# Altium PCB FEM.PcbDoc (part 1 of 2)
Units mil, origin at the board's own origin, x right, y up, seen from the top; angles counter-clockwise.
Board outline 1528 x 1869 mil, 4 copper layers (Top Layer, Internal Plane 1, Signal Layer 1, Bottom Layer), stack 60.752 mil thick; 238 components, 134 nets, 657 pads, 326 vias.
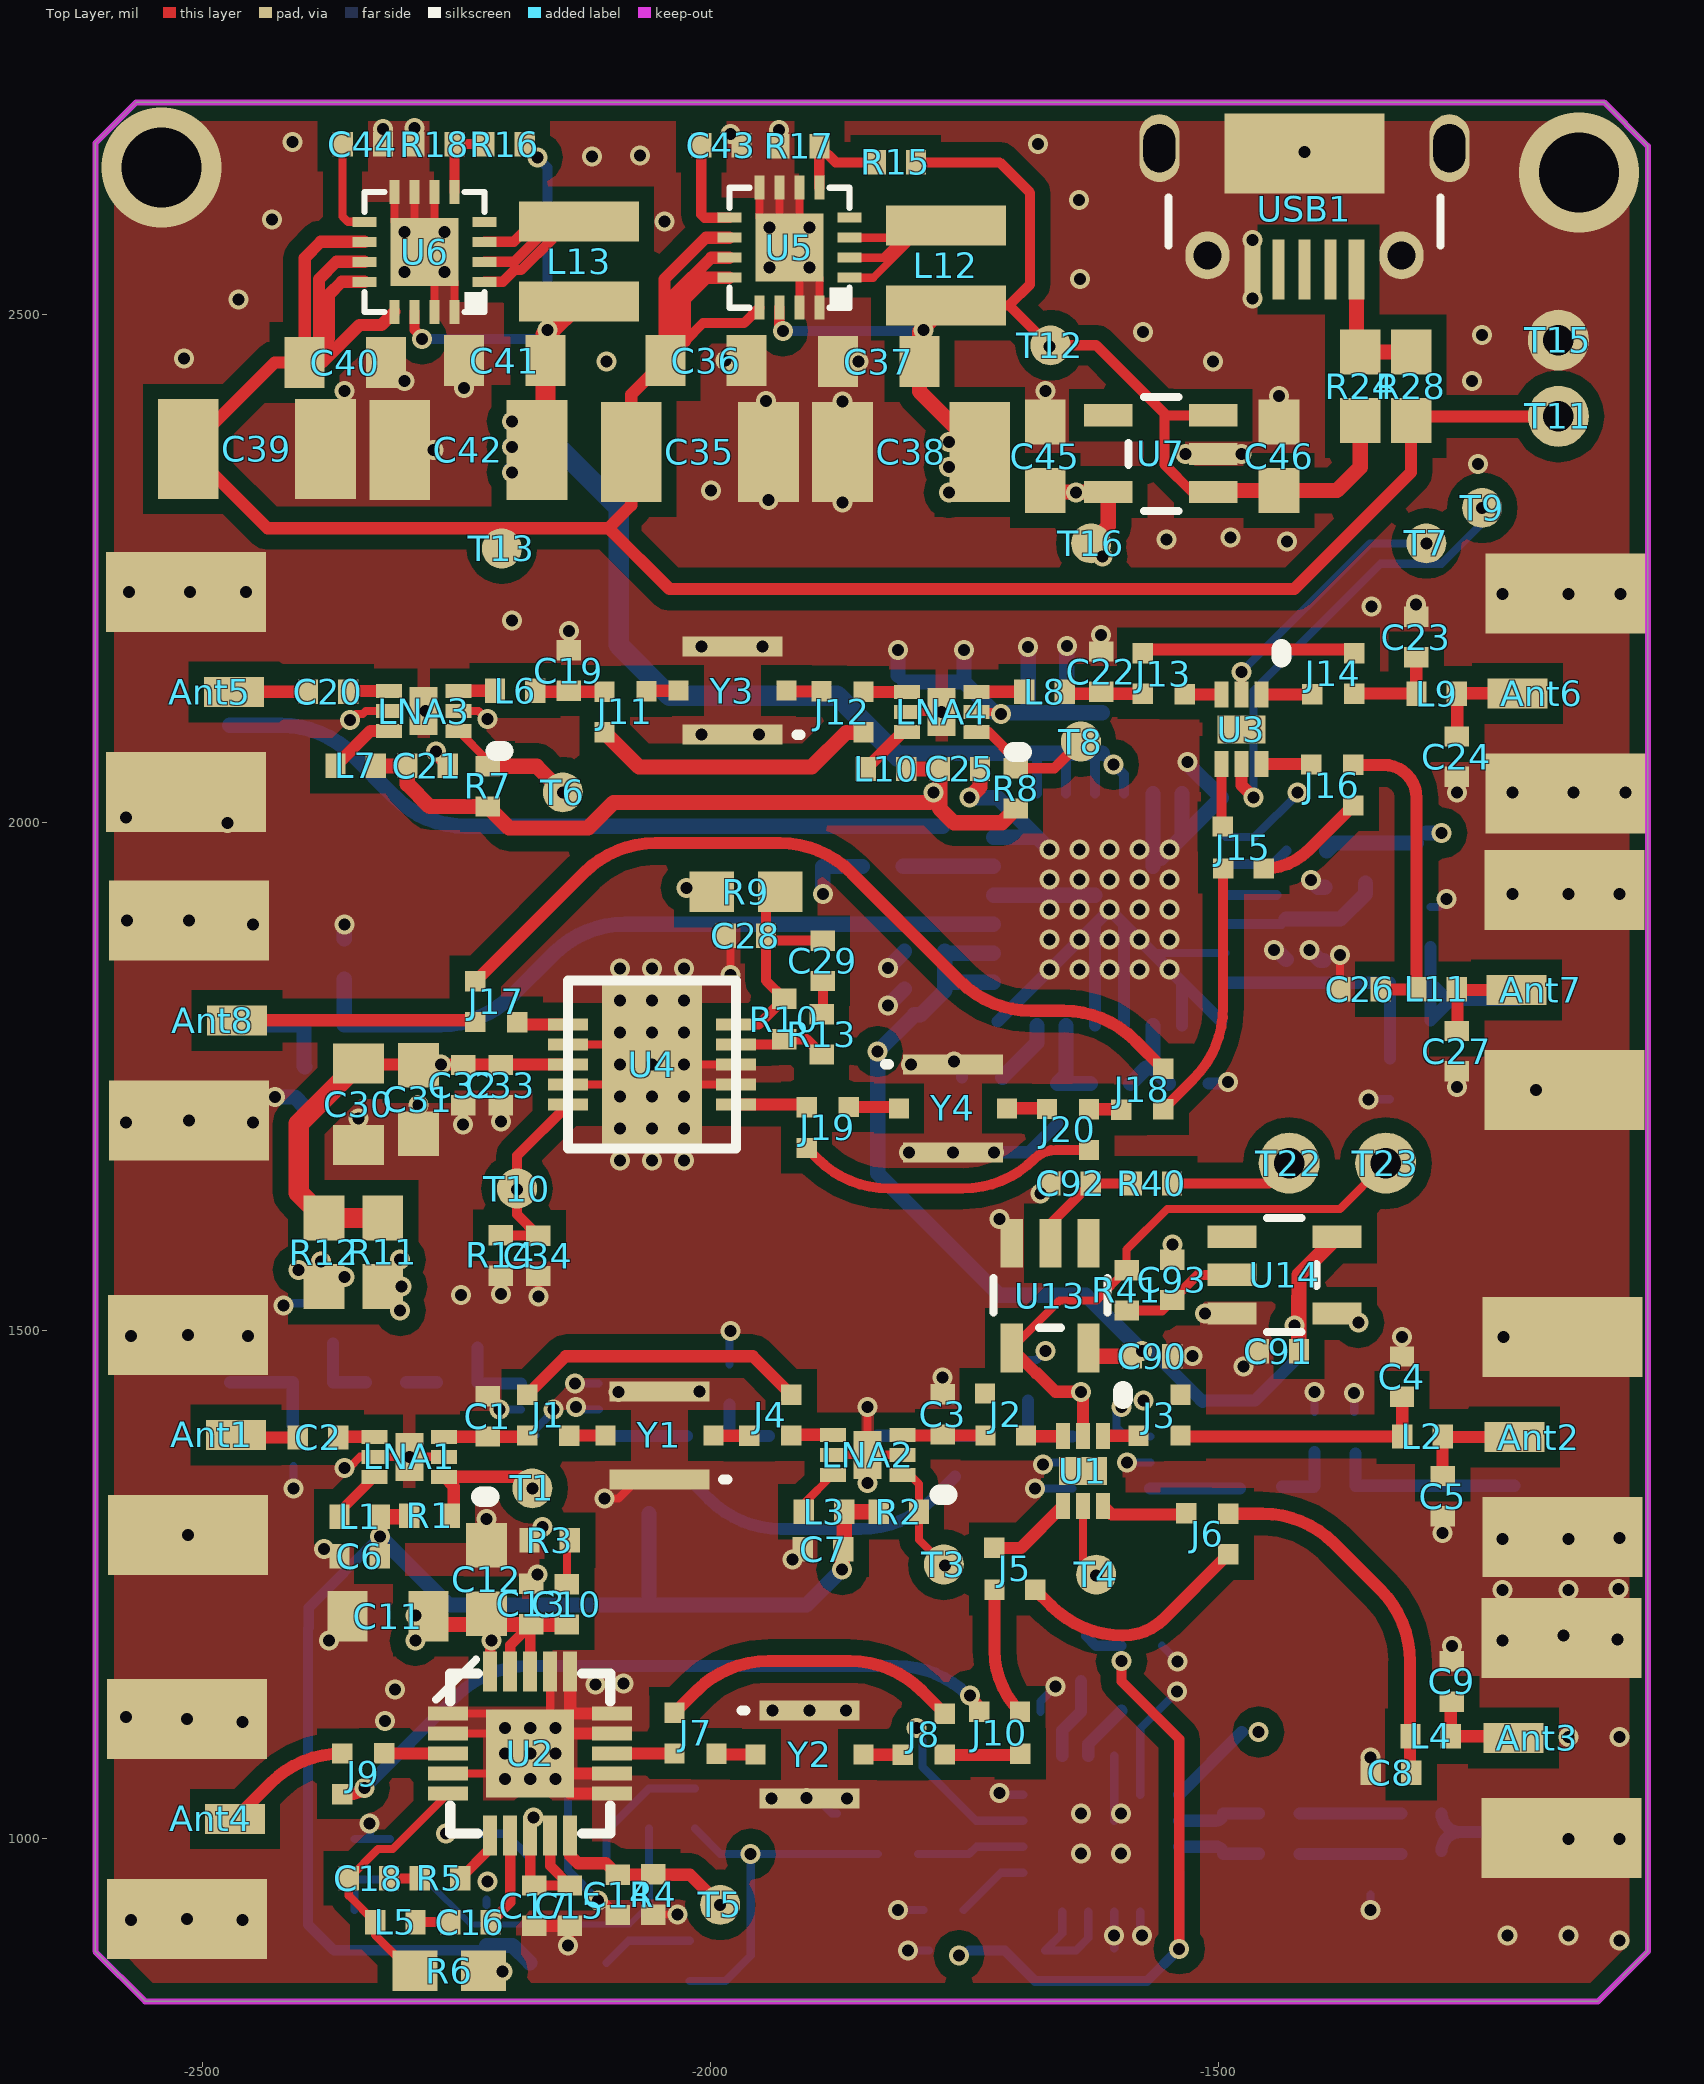
[diagram p0: Top Layer view]
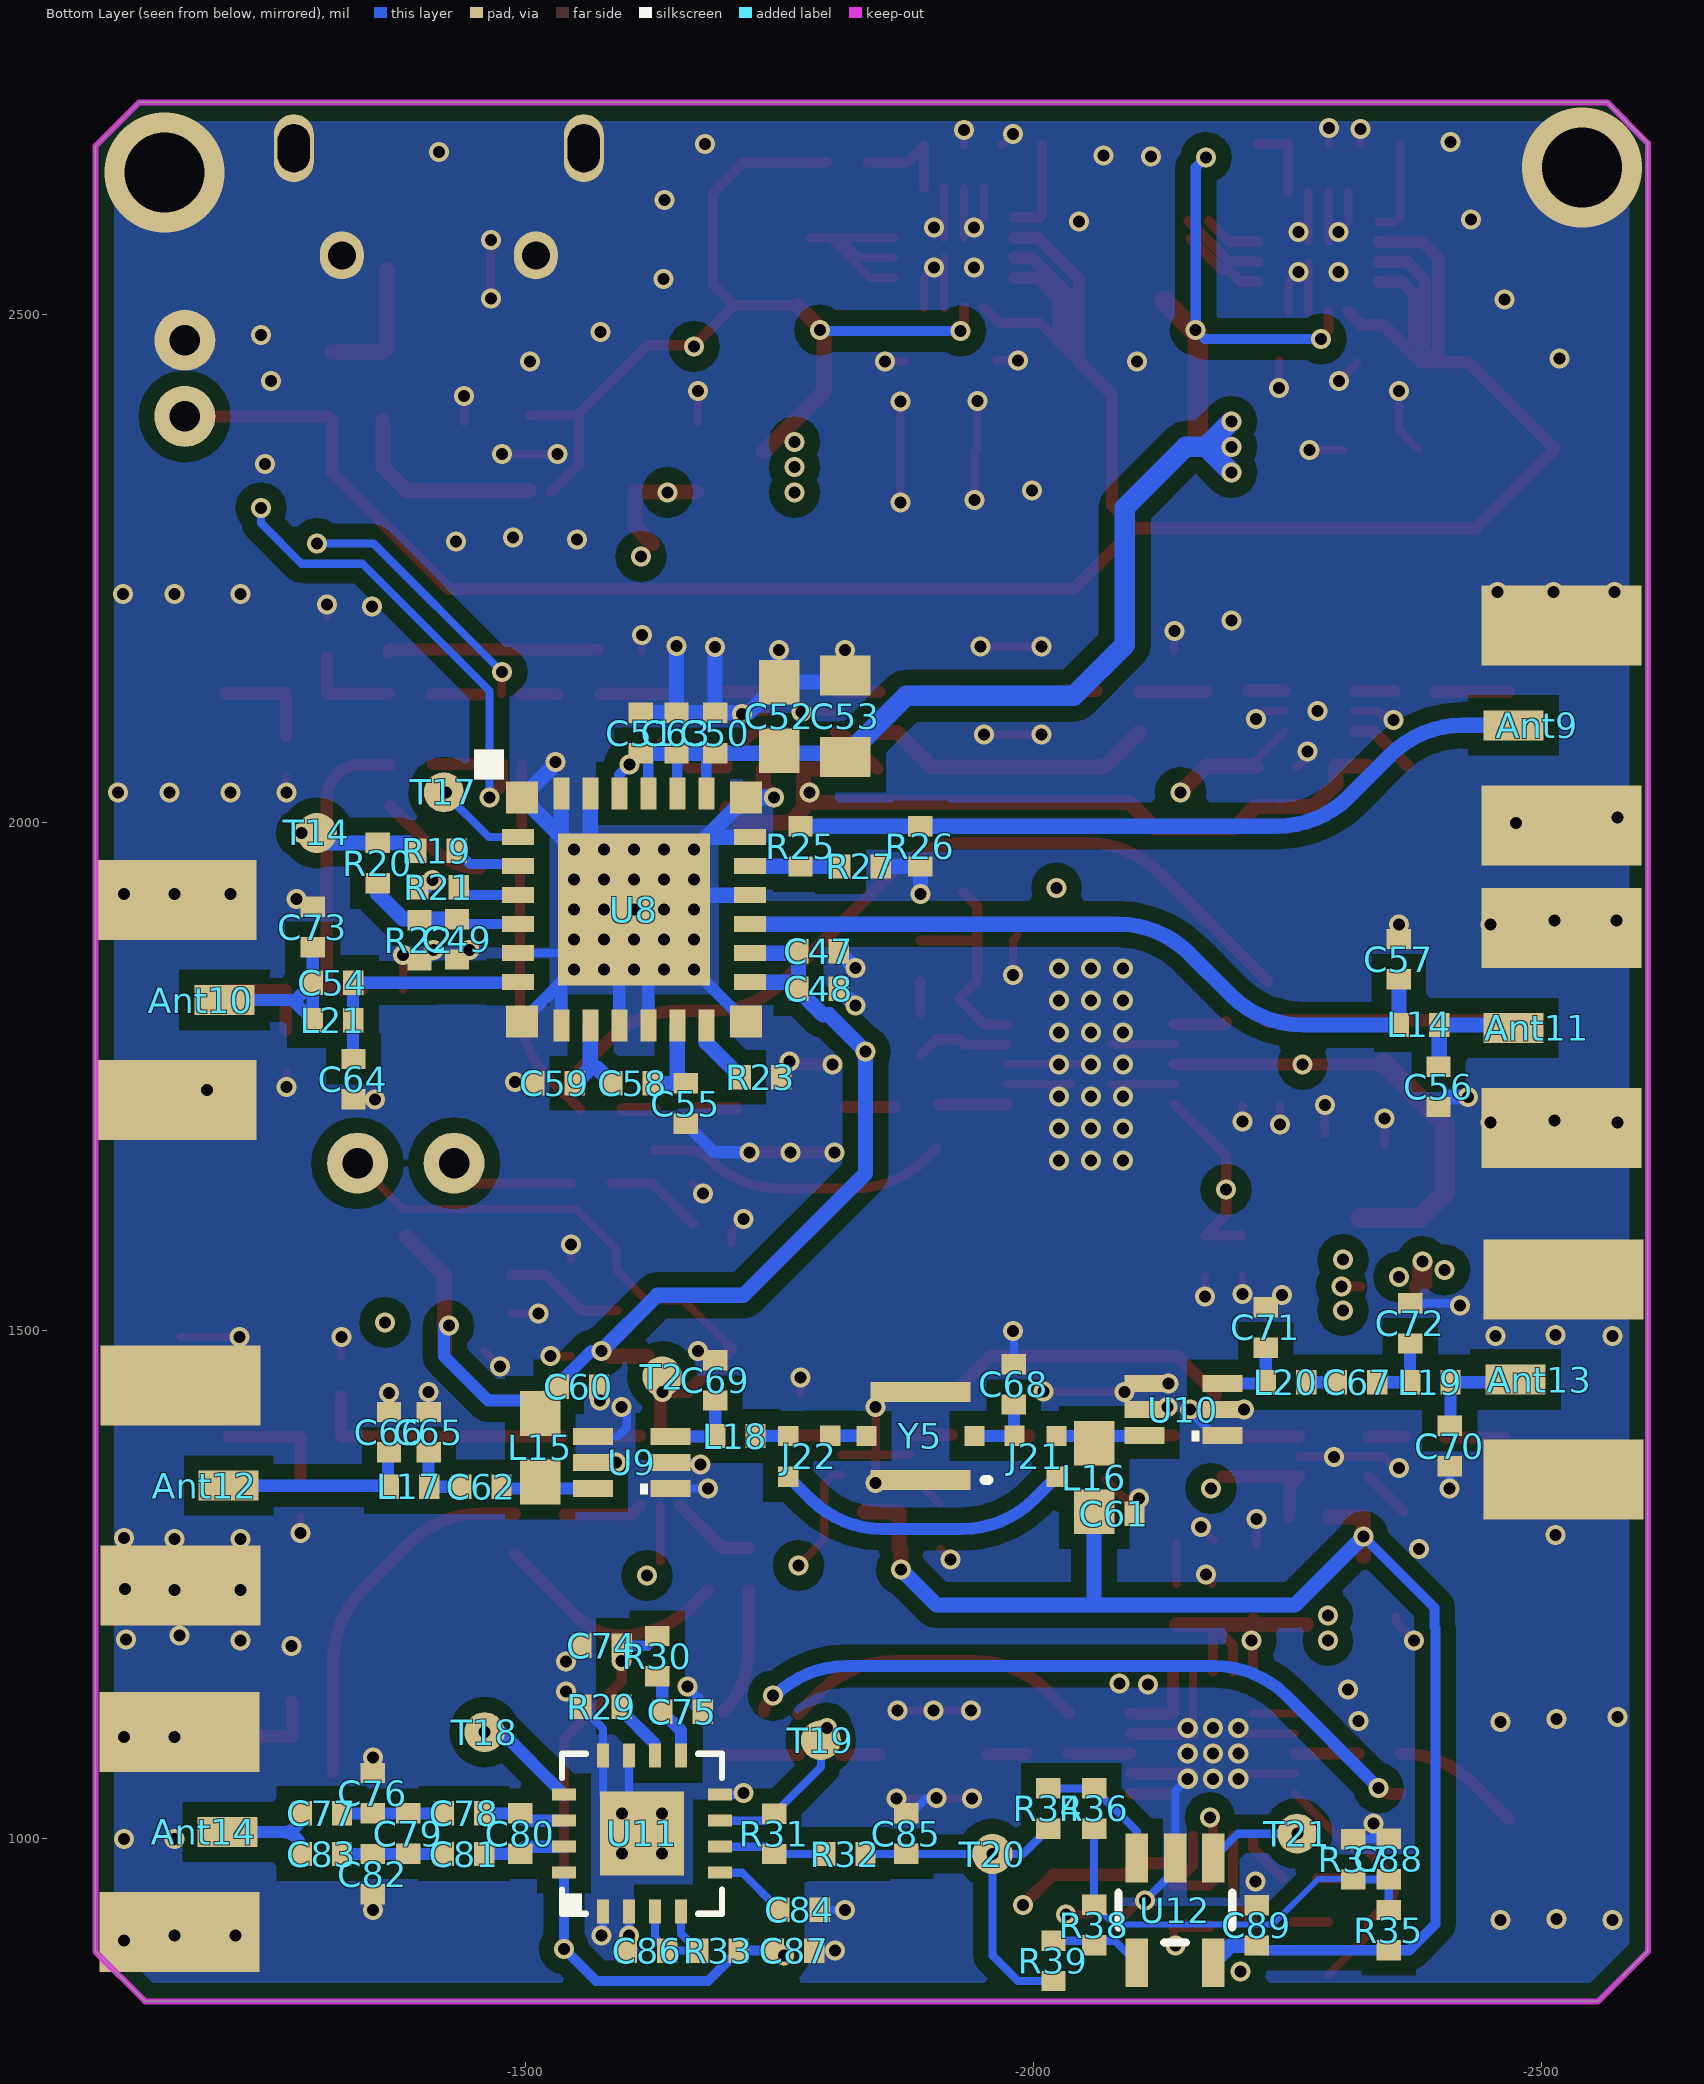
[diagram p1: Bottom Layer view, seen from below]
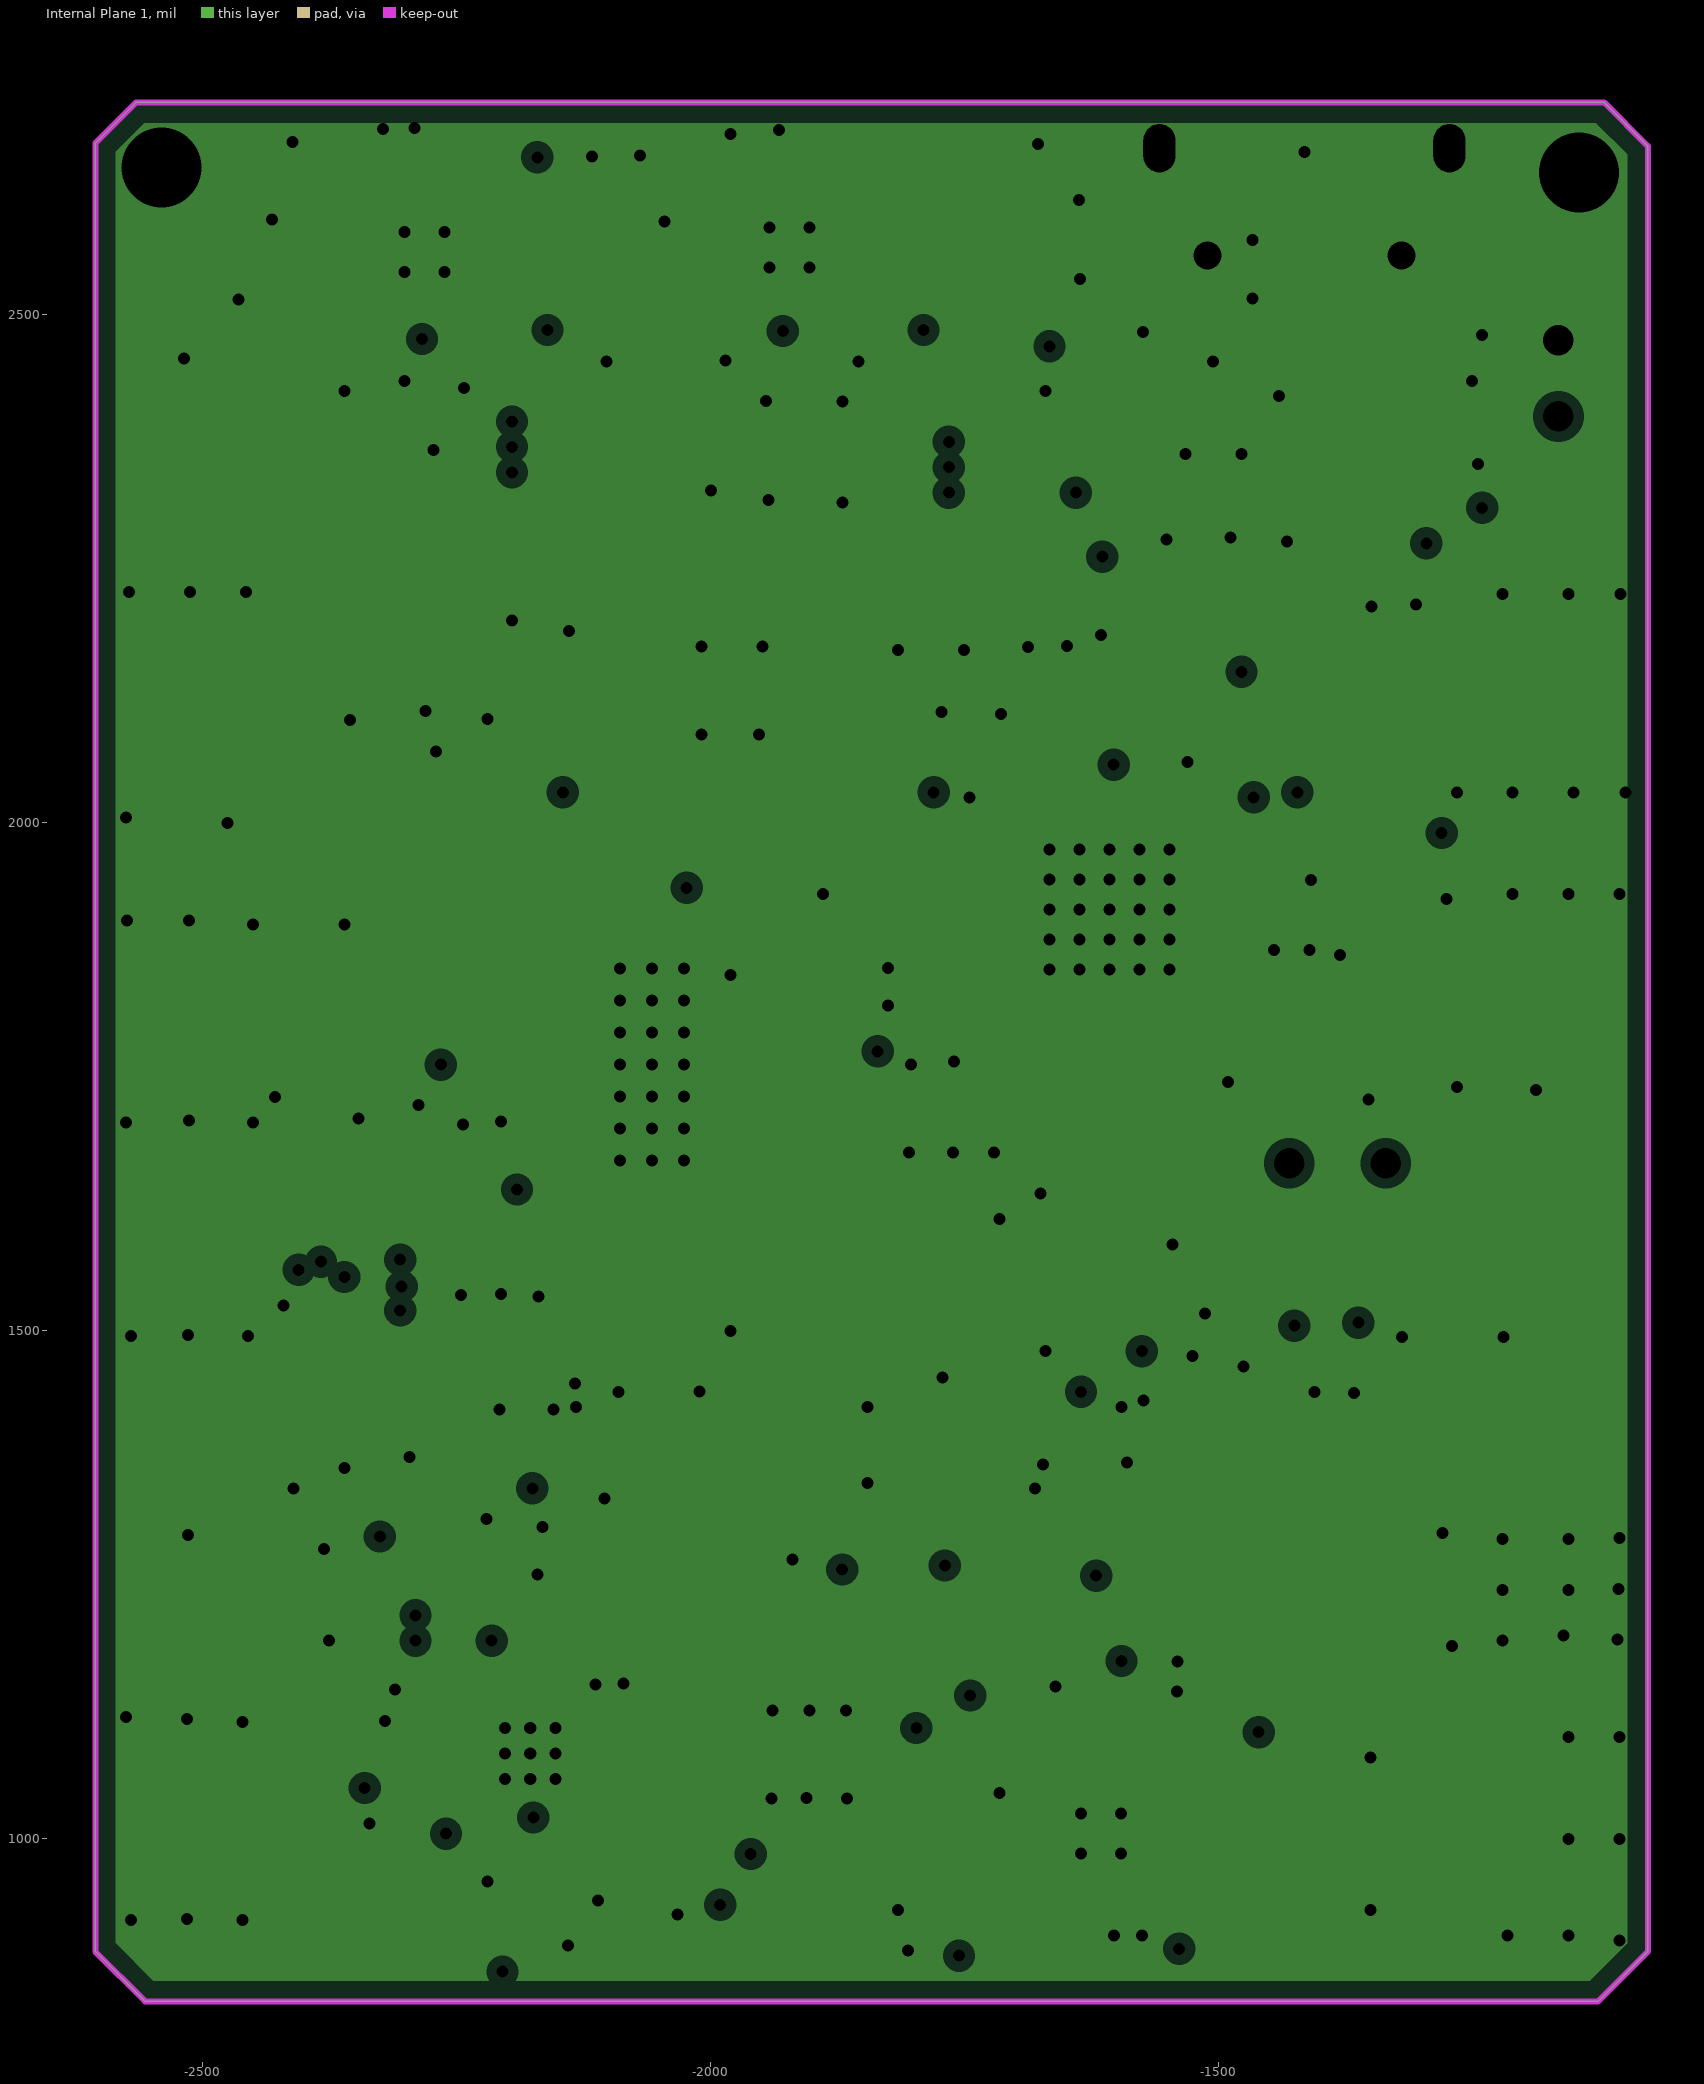
[diagram p2: Internal Plane 1, clearances drawn from the general rule]
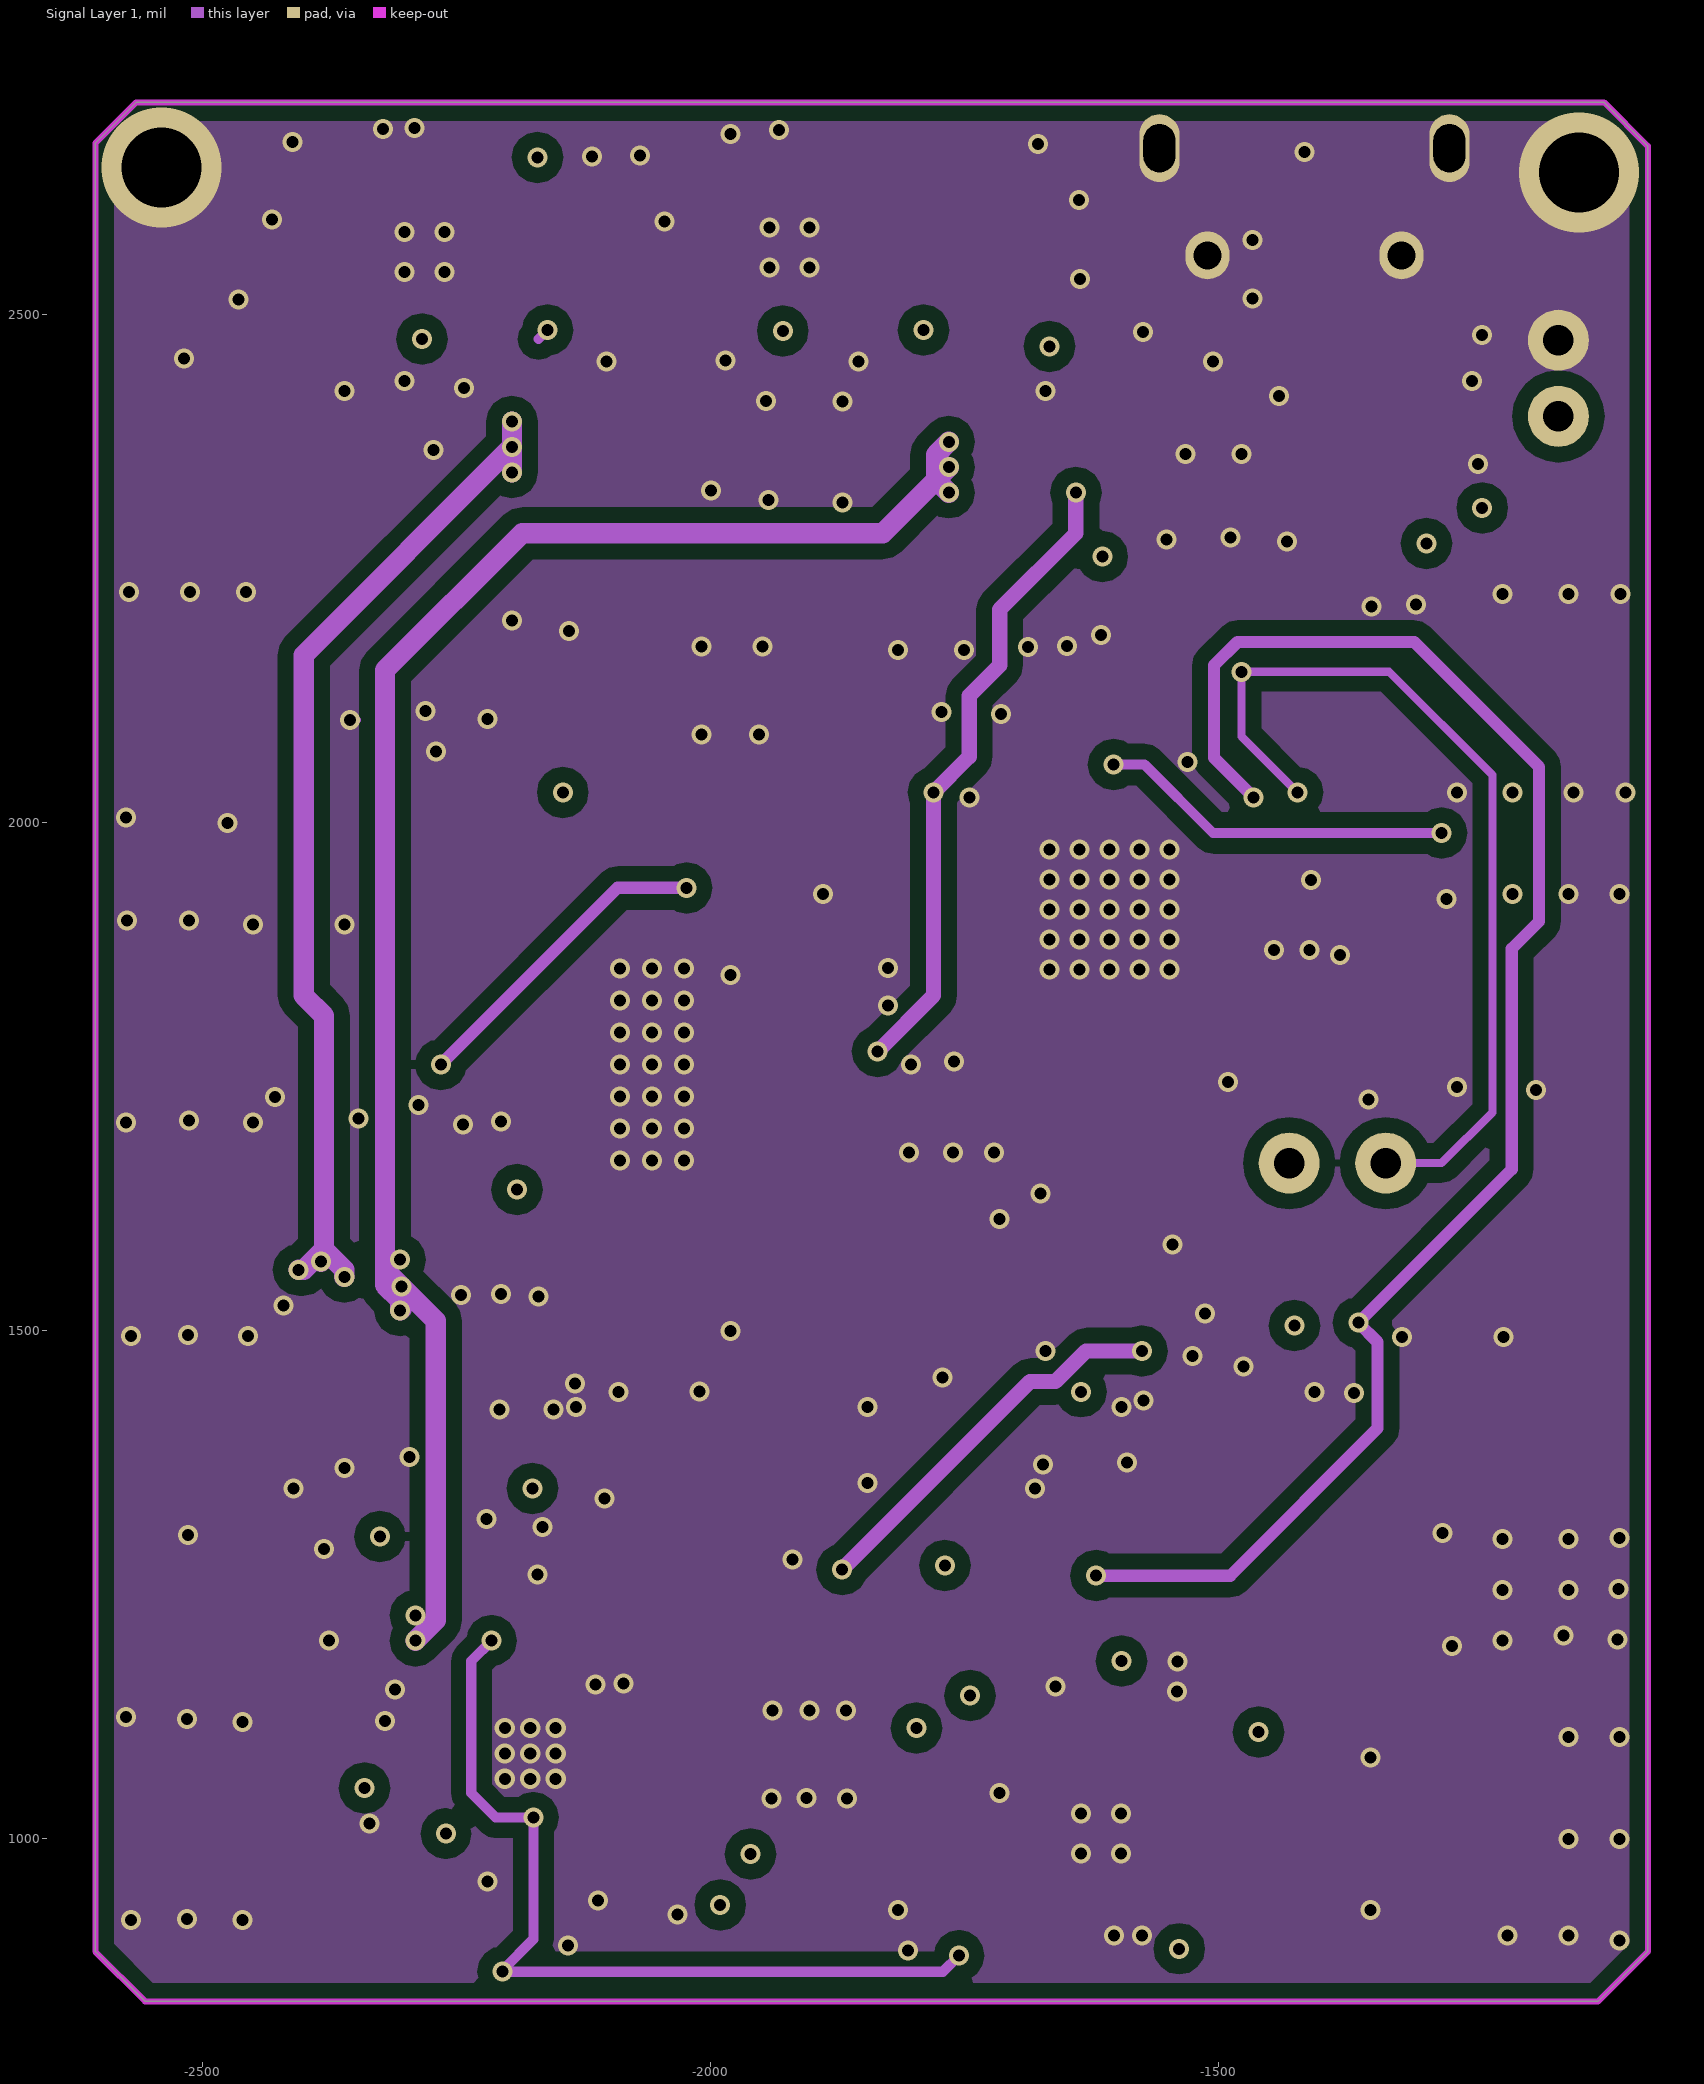
[diagram p3: Signal Layer 1]

## Layer stack, top to bottom
Top Solder: solder mask 0.4, Solder Resist, Dk 3.5
Top Layer: signal copper 1.4
Dielectric 1: prepreg 7.874, FR-4, Dk 4.2
Internal Plane 1: plane copper 1.4169, net GND
Dielectric 3: core 39.3701, Dk 4.2
Signal Layer 1: signal copper 1.4169
Dielectric 2: prepreg 7.874, Dk 4.2
Bottom Layer: signal copper 1.4
Bottom Solder: solder mask 0.4, Solder Resist, Dk 3.5

## Board outline
-2605,889 -2605,2669 -2565,2709 -1120,2709 -1077,2666 -1077,889 -1126,840 -2556,840

## Design rules (kind name [scope] priority, off if disabled: settings)
Clearance Clearance_1 [(InNamedPolygon('Bottom Layer-No Net')) vs Not InNet('GND')] p1: gap=15 ignorepadtopadclearanceinfootprint=FALSE except(0: Arc-Hole Track-Hole SMDPad-Hole THPad-Hole Via-Hole Fill-Hole Poly-Hole Region-Hole Text-Hole)
Clearance [All] p2: gap=6 ignorepadtopadclearanceinfootprint=FALSE except(0: Arc-Hole Track-Hole SMDPad-Hole THPad-Hole Via-Hole Fill-Hole Poly-Hole Region-Hole Text-Hole)
DiffPairsRouting [All] p1: maxlimit=10 minlimit=10 mostfreqgap=10 toplayer_minwidth=5.98 toplayer_maxwidth=15 toplayer_prefwidth=15 midlayer1_minwidth=5.98 midlayer1_maxwidth=15 midlayer1_prefwidth=15 bottomlayer_minwidth=5.98 bottomlayer_maxwidth=15 bottomlayer_prefwidth=15 maxuncoupledlength=500
MinimumSolderMaskSliver [All] p1 off: minsoldermaskwidth=10
PlaneClearance [All] p1: clearance=10
PlaneConnect [All] p1: planeconnectstyle=Direct reliefexpansion=20 reliefentries=4 reliefconductorwidth=10 reliefairgap=10
PolygonConnect [All] p1: connectstyle=Direct reliefconductorwidth=10 reliefentries=4 polygonreliefangle="90 Angle" airgapwidth=10
RoomDefinition Detector [InComponentClass('Detector')] p1 off: confinementstyle=ConfineIn formatcopy=TRUE lockcomponents=FALSE outline -1032,1519 6547,1519 6547,1914 -1032,1914
RoomDefinition Wideband [InComponentClass('Wideband')] p2 off: confinementstyle=ConfineIn formatcopy=TRUE lockcomponents=FALSE outline -591,2547 4878,2547 4878,2942 -591,2942
RoomDefinition 5.8FEM [InComponentClass('5.8FEM')] p3 off: confinementstyle=ConfineIn formatcopy=TRUE lockcomponents=FALSE outline -591,1339 9751,1339 9751,1734 -591,1734
RoomDefinition power [InComponentClass('power')] p4 off: confinementstyle=ConfineIn formatcopy=TRUE lockcomponents=FALSE outline -595,900 1750,900 1750,1140 -595,1140
RoomDefinition 400M [InComponentClass('400M')] p5 off: confinementstyle=ConfineIn formatcopy=TRUE lockcomponents=FALSE outline 1440,800 8825,800 8825,1200 1440,1200
RoomDefinition 2.4FEM [InComponentClass('2.4FEM')] p6 off: confinementstyle=ConfineIn formatcopy=TRUE lockcomponents=FALSE outline 1485,2340 4295,2340 4295,4060 1485,4060
RoutingVias [All] p1: holewidth=12 width=20 viastyle="Through Hole" minholewidth=11.81 minwidth=19.68 maxholewidth=28 maxwidth=50
SilkToBoardRegionClearance [All] p1 off:
SilkToSilkClearance [All] p1 off: silktosilkclearance=10
SilkToSolderMaskClearance [IsPad] p1 off: minsilkscreentomaskgap=10 clearancetoexposedcopper=TRUE
SolderMaskExpansion [All] p1: expansion=4
Width [All] p1: maxlimit=60 minlimit=6 preferedwidth=6
23 further rules are at their usual default settings.

## Classes and differential pairs
component class Wideband: Ant12 Ant13 C60 C61 C62 C65 C66 C67 C68 C69 C70 C71 C72 J21 J22 L15 L16 L17 L18 L19 L20 U9 U10 Y5
component class 400M: Ant9 Ant10 Ant11 C47 C48 C49 C50 C51 C52 C53 C54 C55 C56 C57 C58 C59 C63 C64 C73 L14 L21 R19 R20 R21 R22 R23 R25 R26 R27 T17 U8
component class 5.8FEM: Ant1 Ant2 Ant3 Ant4 C1 C2 C3 C4 C5 C6 C7 C8 C9 C10 C11 C12 C13 C14 C15 C16 C17 C18 J1 J2 J3 J4 J5 J6 J7 J8 J9 J10 L1 L2 L3 L4 L5 LNA1 LNA2 R1 R2 R3 R4 R5 R6 T1 T2 T3 T4 T5 U1 U2 Y1 Y2
component class 2.4FEM: Ant5 Ant6 Ant7 Ant8 C19 C20 C21 C22 C23 C24 C25 C26 C27 C28 C29 C30 C31 C32 C33 C34 J11 J12 J13 J14 J15 J16 J17 J18 J19 J20 L6 L7 L8 L9 L10 L11 LNA3 LNA4 R7 R8 R9 R10 R11 R12 R13 R14 T6 T7 T8 T9 T10 U3 U4 Y3 Y4
component class power: C35 C36 C37 C38 C39 C40 C41 C42 C43 C44 C45 C46 C90 C91 C92 C93 L12 L13 R15 R16 R17 R18 R24 R28 R40 R41 T11 T12 T13 T14 T15 T16 T22 T23 U5 U6 U7 U13 U14 USB1
component class Detector: Ant14 C74 C75 C76 C77 C78 C79 C80 C81 C82 C83 C84 C85 C86 C87 C88 C89 R29 R30 R31 R32 R33 R34 R35 R36 R37 R38 R39 T18 T19 T20 T21 U11 U12

## Components (designator, comment, footprint, x,y, rotation, side; value= is the part's Value field where it differs from the comment)
Ant1 "Antenna" SMA-2 -2514,1496 r270 top
Ant2 "Antenna" SMA-2 -1161,1297 r90 top
Ant3 "Antenna" SMA-2 -1162,1001 r90 top
Ant4 "Antenna" SMA-2 -2515,1118 r270 top
Ant5 "Antenna" SMA-2 -2516,2227 r270 top
Ant6 "Antenna" SMA-2 -1158,2029 r90 top
Ant7 "Antenna" SMA-2 -1159,1737 r90 top
Ant8 "Antenna" SMA-2 -2513,1904 r270 top
Ant9 "Antenna" SMA-2 -2520,1997.58 r90 bottom
Ant10 "Antenna" SMA-2 -1157,1924 r270 bottom
Ant11 "Antenna" SMA-2 -2520,1699.58 r90 bottom
Ant12 "Antenna" SMA-2 -1161,1446 r270 bottom
Ant13 "Antenna" SMA-2 -2522,1353.42 r90 bottom
Ant14 "Antenna" SMA-2 -1160,1105 r270 bottom
C1 "Cap" 0402 -2219,1416 r270 top
C2 "NC/22p" 0402 -2386,1395 r0 top
C3 "Cap" 0402 -1771,1418 r270 top
C4 "Cap" 0402 -1319,1455 r270 top
C5 "Cap" 0402 -1279,1337 r90 top
C6 "Cap" 0402 -2345,1278 r0 top
C7 "Cap" 0402 -1889,1285 r0 top
C8 "Cap" 0402 -1330,1065 r0 top
C9 "Cap" 0402 -1270,1155 r270 top
C10 "Cap" 0402 -2141,1231 r270 top
C11 "Cap" 0805 -2317,1219 r0 top
C12 "1uF" 0603 -2220,1255 r90 top
C13 "Cap" 0402 -2176,1231 r90 top
C14 "Cap" 0402 -2091,945 r270 top
C15 "Cap" 0402 -2138,934 r90 top
C16 "Cap" 0402 -2236,918 r0 top
C17 "Cap" 0402 -2173,934 r90 top
C18 "Cap" 0402 -2336,961 r0 top
C19 "Cap" 0402 -2139,2150 r270 top
C20 "NC/22p" 0402 -2376,2129 r0 top
C21 "Cap" 0402 -2278,2056 r180 top
C22 "Cap" 0402 -1615,2149 r270 top
C23 "Cap" 0402 -1305,2183 r270 top
C24 "Cap" 0402 -1265,2065 r90 top
C25 "Cap" 0402 -1754,2053 r180 top
C26 "Cap" 0402 -1360,1836 r0 top
C27 "Cap" 0402 -1265,1775 r90 top
C28 "Cap" 0402 -1965,1889 r0 top
C29 "Cap" 0402 -1889,1864 r90 top
C30 "Cap" 0805 -2346,1723 r270 top
C31 "Cap" 0603 -2287,1728 r270 top
C32 "Cap" 0402 -2243,1742 r270 top
C33 "Cap" 0402 -2206,1742 r270 top
C34 "Cap" 0402 -2169,1574 r270 top
C35 "Cap" 1210 -2010,2365 r0 top
C36 "Cap" 0805 -2004,2455 r0 top
C37 "Cap" 0805 -1834,2454 r0 top
C38 "Cap" 1210 -1802,2365 r0 top
C39 "Cap" 1210 -2446,2368 r0 top
C40 "Cap" 0805 -2359,2453 r0 top
C41 "Cap" 0805 -2202,2455 r0 top
C42 "Cap" 1210 -2238,2367 r0 top
C43 "3.3nF" 0402 -1989,2667 r0 top
C44 "3.3nF" 0402 -2342,2668 r0 top
C45 "4.7uF" 0603 -1670,2361 r270 top
C46 "4.7uF" 0603 -1440,2361 r270 top
C47 "Cap" 0402 -1788.94,1873.53 r0 bottom
C48 "Cap" 0402 -1788.94,1836.53 r0 bottom
C49 "Cap" 0402 -1432.94,1885.53 r270 bottom
C50 "Cap" 0402 -1686.94,2088.53 r270 bottom
C51 "Cap" 0402 -1613.94,2088.53 r270 bottom
C52 "Cap" 0603 -1750,2105 r270 bottom
C53 "Cap" 0805 -1815,2105 r270 bottom
C54 "Cap" 0402 -1311,1842.58 r0 bottom
C55 "Cap" 0402 -1657.94,1723.53 r90 bottom
C56 "Cap" 0402 -2399,1740 r90 bottom
C57 "Cap" 0402 -2360,1866 r270 bottom
C58 "Cap" 0402 -1605.94,1743.53 r0 bottom
C59 "Cap" 0402 -1528.94,1743.53 r180 bottom
C60 "Cap" 0402 -1553,1445 r0 bottom
C61 "Cap" 0402 -2080,1320 r0 bottom
C62 "Cap" 0402 -1457,1346.42 r0 bottom
C63 "Cap" 0402 -1648.94,2088.53 r270 bottom
C64 "Cap" 0402 -1331,1747.58 r90 bottom
C65 "Cap" 0402 -1405,1400.42 r270 bottom
C66 "Cap" 0402 -1366,1400.42 r270 bottom
C67 "Cap" 0402 -2319,1449.42 r0 bottom
C68 "Cap" 0402 -1981,1447.42 r270 bottom
C69 "Cap" 0402 -1687,1451.42 r270 bottom
C70 "Cap" 0402 -2410,1386.42 r90 bottom
C71 "Cap" 0402 -2229,1503.42 r270 bottom
C72 "Cap" 0402 -2371,1507.42 r270 bottom
C73 "Cap" 0402 -1291,1897.58 r270 bottom
C74 "Cap" 0402 -1575,1190 r180 bottom
C75 "Cap" 0402 -1655,1125 r0 bottom
C76 "Cap" 0402 -1350,1045 r270 bottom
C77 "Cap" 0402 -1300,1025 r0 bottom
C78 "Cap" 0402 -1440,1025 r0 bottom
C79 "Cap" 0402 -1385,1005 r90 bottom
C80 "Cap" 0402 -1495,1005 r90 bottom
C81 "Cap" 0402 -1440,985 r0 bottom
C82 "Cap" 0402 -1350,965 r90 bottom
C83 "Cap" 0402 -1300,985 r0 bottom
C84 "Cap" 0402 -1770,930 r180 bottom
C85 "Cap" 0402 -1875,1005 r90 bottom
C86 "Cap" 0402 -1620,890 r180 bottom
C87 "Cap" 0402 -1765,890 r0 bottom
C88 "Cap" 0402 -2350,980 r90 bottom
C89 "Cap" 0402 -2220,915 r270 bottom
C90 "0.1uF" 0402 -1565,1475 r0 top
C91 "0.1uF" 0402 -1440,1480 r180 top
C92 "NC" 0402 -1645,1645 r180 top
C93 "NC" 0402 -1545,1550 r90 top
J1 "jumper" 0402J#1 -2180,1397 r90 top
J2 "jumper" 0402J#2 -1729,1397 r0 top
J3 "jumper" 0402J#2 -1537,1397 r90 top
J4 "jumper" 0402J#2 -1920,1397 r90 top
J5 "jumper" 0402J#2 -1720,1245 r0 top
J6 "jumper" 0402J#1 -1490,1320 r270 top
J7 "jumper" 0402J#1 -2035,1084 r90 top
J8 "jumper" 0402J#2 -1769,1083 r90 top
J9 "jumper" 0402J#2 -2362,1084 r270 top
J10 "jumper" 0402J#2 -1695,1125 r180 top
J11 "jumper" 0402J#2 -2104,2129 r270 top
J12 "jumper" 0402J#1 -1849,2129 r270 top
J13 "jumper" 0402J#1 -1574,2127 r90 top
J14 "jumper" 0402J#2 -1366,2127 r90 top
J15 "jumper" 0402J#2 -1495,1955 r0 top
J16 "jumper" 0402J#1 -1367,2057 r270 top
J17 "jumper" 0402J#1 -2231,1804 r90 top
J18 "jumper" 0402J#2 -1554,1718 r90 top
J19 "jumper" 0402J#2 -1905,1720 r270 top
J20 "jumper" 0402J#1 -1627,1718 r270 top
J21 "jumper" 0402J#1 -2023,1396.42 r270 bottom
J22 "jumper" 0402J#2 -1759,1396.42 r270 bottom
L1 "Inductor" 0402 -2345,1317 r0 top
L2 "Inductor" 0402 -1299,1396 r0 top
L3 "Inductor" 0402 -1888,1322 r0 top
L4 "Inductor" 0402 -1291,1101 r0 top
L5 "Inductor" 0402 -2310,918 r0 top
L6 "Inductor" 0402 -2192,2130 r0 top
L7 "Inductor" 0402 -2349,2056 r0 top
L8 "Inductor" 0402 -1671,2129 r0 top
L9 "Inductor" 0402 -1285,2127 r0 top
L10 "Inductor" 0402 -1827,2053 r0 top
L11 "Inductor" 0402 -1285,1836 r0 top
L12 "2.2uH" L3015 -1768,2588 r270 top
L13 "2.2uH" L3015 -2129,2592 r270 top
L14 "Inductor" 0402 -2380,1801 r0 bottom
L15 "Inductor" 0603 -1515,1385.1 r270 bottom
L16 "Inductor" 0603 -2060,1355.32 r90 bottom
L17 "Inductor" 0402 -1386,1346.42 r0 bottom
L18 "Inductor" 0402 -1707,1396.42 r0 bottom
L19 "Inductor" 0402 -2391,1449.42 r0 bottom
L20 "Inductor" 0402 -2249,1449.42 r0 bottom
L21 "Inductor" 0402 -1311,1805.58 r0 bottom
LNA1 "SKY65404" SKY65404-31 -2296,1376 r180 top
LNA2 "SKY65404" SKY65404-31 -1845,1378 r180 top
LNA3 "SKY65405" SKY65404-31 -2282,2110 r180 top
LNA4 "SKY65405" SKY65404-31 -1772,2109 r180 top
R1 "Res2" 0402 -2276,1318 r180 top
R2 "Res2" 0402 -1814,1322 r180 top
R3 "Res2" 0402 -2158,1294 r0 top
R4 "Res2" 0402 -2056,945 r90 top
R5 "Res2" 0402 -2266,961 r0 top
R6 "TBD" 0603 -2257,870 r0 top
R7 "Res2" 0402 -2219,2036 r270 top
R8 "Res2" 0402 -1699,2034 r270 top
R9 "Res2" 0603 -1965,1932 r0 top
R10 "Res2" 0402 -1927,1807 r270 top
R11 "Res2" 0603 -2322,1577 r90 top
R12 "Res2" 0603 -2380,1577 r90 top
R13 "Res2" 0402 -1890,1792 r270 top
R14 "Res2" 0402 -2206,1574 r90 top
R15 "51k 1%" 0402 -1817,2650 r180 top
R16 "35K 1%" 0402 -2202,2668 r180 top
R17 "10k 1%" 0402 -1912,2666 r180 top
R18 "10k 1%" 0402 -2271,2668 r180 top
R19 "Res2" 0402 -1412.94,1972.53 r0 bottom
R20 "Res2" 0402 -1354.94,1960.53 r270 bottom
R21 "Res2" 0402 -1414.94,1936.53 r0 bottom
R22 "Res2" 0402 -1395.94,1884.53 r270 bottom
R23 "Res2" 0402 -1731.94,1749.53 r180 bottom
R24 "NC" 0603 -1360,2430 r270 top
R25 "Res2" 0402 -1771,1977 r270 bottom
R26 "Res2" 0402 -1889,1977 r270 bottom
R27 "Res2" 0402 -1830,1957 r180 bottom
R28 "NC" 0603 -1310,2430 r270 top
R29 "Res2" 0402 -1575,1130 r180 bottom
R30 "Res2" 0402 -1630,1180 r270 bottom
R31 "Res2" 0402 -1745,1005 r270 bottom
R32 "Res2" 0402 -1815,985 r180 bottom
R33 "Res2" 0402 -1690,890 r180 bottom
R34 "Res2" 0402 -2015,1030 r270 bottom
R35 "Res2" 0402 -2350,910 r90 bottom
R36 "Res2" 0402 -2060,1030 r270 bottom
R37 "Res2" 0402 -2315,980 r270 bottom
R38 "Res2" 0402 -2060,915 r90 bottom
R39 "Res2" 0402 -2020,880 r270 bottom
R40 "0R" 0402 -1565,1645 r180 top
R41 "0R" 0402 -1590,1540 r270 top
T1 "TestPad" "TestPad - 1mm" -2175,1345 r0 top
T2 "TestPad" "TestPad - 1mm" -1635,1455 r180 bottom
T3 "TestPad" "TestPad - 1mm" -1770,1270 r0 top
T4 "TestPad" "TestPad - 1mm" -1620,1260 r0 top
T5 "TestPad" "TestPad - 1mm" -1990,935 r0 top
T6 "TestPad" "TestPad - 1mm" -2145,2030 r0 top
T7 "TestPad" "TestPad - 1mm" -1295,2275 r0 top
T8 "TestPad" "TestPad - 1mm" -1635,2080 r0 top
T9 "TestPad" "TestPad - 1mm" -1240,2310 r0 top
T10 "TestPad" "TestPad - 1mm" -2190,1640 r90 top
T11 "TestPad" TestPad -1165,2400 r0 top
T12 "TestPad" "TestPad - 1mm" -1665,2470 r90 top
T13 "TestPad" "TestPad - 1mm" -2205,2270 r90 top
T14 "TestPad" "TestPad - 1mm" -1295,1990 r90 bottom
T15 "TestPad" TestPad -1165,2475 r90 top
T16 "TestPad" "TestPad - 1mm" -1625,2275 r90 top
T17 "TestPad" "TestPad - 1mm" -1420,2030 r90 bottom
T18 "TestPad" "TestPad - 1mm" -1460,1105 r90 bottom
T19 "TestPad" "TestPad - 1mm" -1791,1097 r90 bottom
T20 "TestPad" "TestPad - 1mm" -1960,985 r90 bottom
T21 "TestPad" "TestPad - 1mm" -2260,1005 r90 bottom
T22 "TestPad" TestPad -1430,1665 r90 top
T23 "TestPad" TestPad -1335,1665 r90 top
U1 "SKY13411" SKY65404-31 -1633,1362 r270 top
U2 "SE5004L" SE5004L -2177,1084 r0 top
U3 "SKY13411" SKY65404-31 -1477,2092 r270 top
U4 "Sky65174-21" SKY65174-21 -2057,1762 r0 top
U5 "TPS62130" TPS62130 -1922,2566 r180 top
U6 "TPS62130" TPS62130 -2281,2562 r180 top
U7 "LP5907" SOT23-5 -1556,2363 r90 top
U8 "SKY65366" SKY65366 -1606.94,1914.53 r180 bottom
U9 "MGA81563" SC-70-6 -1605,1370.42 r180 bottom
U10 "MGA81563" SC-70-6 -2148,1422.42 r180 bottom
U11 "AD8318" AD8318 -1615,1005 r90 bottom
U12 "CMP-SOT23" SOT23-5 -2140,930 r0 bottom
U13 "INVERTER-SOT23" SOT23-5 -1665,1535 r180 top
U14 "INVERTER-SOT23" SOT23-5 -1435,1555 r270 top
USB1 "USB Micro Type B" MICRO-YZX -1415,2775 r180 top
Y1 "2450BP39C100A" 2450BP39C100A -2050,1397 r180 top
Y2 "2450BP39C100A" 2450BP39C100A -1902,1083 r0 top
Y3 "2450BP39C100A" 2450BP39C100A -1978,2130 r180 top
Y4 "2450BP39C100A" 2450BP39C100A -1761,1719 r0 top
Y5 "2450BP39C100A" 2450BP39C100A -1889,1396.42 r0 bottom

## Footprints (in the part's own frame and the unit in brackets; to place one, negate y for a bottom-side part, rotate by r counter-clockwise, add the part's x,y. Pads: shape width x height; smd on the part's side, far side on the other; paste and mask are expansions set on the pad)
0402 [mil] "0402-RES"
  rect 20x24 smd: 1(-19.68,0) 2(20,0)
0402J#1 [mil] "0402-RES"
  rect 20x20 smd: 1(40,0) 2(0,0) 3(-0.35,-41.34)
0402J#2 [mil] "0402-RES"
  rect 20x20 smd: 1(40,0) 2(0,0) 3(-0.35,41.34)
0603 [mil] "0603-RES"
  rect 44x40 smd: 1(-33.46,0) 2(34,0)
0805 [mil]
  rect 39.37x50 smd: 1(-40,0) 2(40,0)
  body extent -50,-30 50,30, height 31
1210 [mm]
  rect 1.52x2.5 smd: 1(-1.715,0) 2(1.715,0)
2450BP39C100A [mm]
  rect 2.5x0.5 smd: 1(0,-1.1) 3(0,1.1)
  rect 0.5x0.5 smd: 2(1.35,0) 4(-1.35,0)
  silkscreen extent -1.7,1.1 -1.6,1.1, body extent -1.25,-1 1.25,1, height 0.9
AD8318 [mm]
  rect 2.1x2.1 smd: 0(0,0)
  rect 0.6x0.3 smd: 1(-1.95,0.975) 2(-1.95,0.325) 3(-1.95,-0.325) 4(-1.95,-0.975) 9(1.95,-0.975) 10(1.95,-0.325) 11(1.95,0.325) 12(1.95,0.975)
  rect 0.3x0.6 smd: 5(-0.975,-1.95) 6(-0.325,-1.95) 7(0.325,-1.95) 8(0.975,-1.95) 13(0.975,1.95) 14(0.325,1.95) 15(-0.325,1.95) 16(-0.975,1.95)
  silkscreen extent -2,-2 2,2, body extent -2,-2 2,2, height 0.6
L3015 [mm]
  rect 1x3 smd: 1(0,0) 2(2,0)
MICRO-YZX [mm]
  rect 0.4x1.5 smd: 1(-1.3,5.85) 5(1.3,5.85)
  rect 0.3x1.5 smd: 2(-0.65,5.85) 3(0,5.85) 4(0.65,5.85)
  oval 1x1.7 hole 0.8 slot 1.2 at 90 deg: 5(-3.625,2.82) 5(3.625,2.82)
  oval 1.1x1.2 hole 0.7: 5(-2.425,5.5) 5(2.425,5.5)
  rect 4x2 smd: 5(0,2.95)
  silkscreen extent -3.4,4.05 3.4,5.25
SC-70-6 [mm]
  rect 1x0.42 smd mask+0.051: 1(0.97,-0.65) 2(0.97,0) 3(0.97,0.65) 4(-0.97,0.65) 5(-0.975,0) 6(-0.97,-0.65)
  silkscreen extent 0.2,-0.8 0.4,-0.52
SE5004L [mm]
  rect 2.2x2.2 smd: 0(0,0)
  rect 1x0.35 smd: 1(-2.05,1) 2(-2.05,0.5) 3(-2.05,0) 4(-2.05,-0.5) 5(-2.05,-1) 11(2.05,-1) 12(2.05,-0.5) 13(2.05,0) 14(2.05,0.5) 15(2.05,1)
  rect 0.35x1 smd: 6(-1,-2.05) 7(-0.5,-2.05) 8(0,-2.05) 9(0.5,-2.05) 10(1,-2.05) 16(1,2.05) 17(0.5,2.05) 18(0,2.05) 19(-0.5,2.05) 20(-1,2.05)
  silkscreen extent -2.35,-2 2,2.35, body extent -2,-2 2,2, height 0.85
SKY65174-21 [mm]
  rect 2.5x4.4 smd: 0(0,0)
  rect 1x0.3 smd: 1(-2.1,1) 2(-2.1,0.5) 3(-2.1,0) 4(-2.1,-0.5) 5(-2.1,-1) 6(2.1,-1) 7(2.1,-0.5) 8(2.1,0) 9(2.1,0.5) 10(2.1,1)
  silkscreen extent -2.1,-2.1 2.1,2.1
SKY65366 [mm]
  rect 3.8x3.8 smd: 0(0,0)
  rect 0.8x0.8 smd: 1(-2.8,2.8) 8(-2.8,-2.8) 15(2.8,-2.8) 22(2.8,2.8)
  rect 0.8x0.4 smd: 2(-2.9,1.813) 3(-2.9,1.088) 4(-2.9,0.363) 5(-2.9,-0.362) 6(-2.9,-1.087) 7(-2.9,-1.812) 16(2.9,-1.812) 17(2.9,-1.087) 18(2.9,-0.362) 19(2.9,0.363) 20(2.9,1.088) 21(2.9,1.813)
  rect 0.4x0.8 smd: 9(-1.813,-2.9) 10(-1.088,-2.9) 11(-0.363,-2.9) 12(0.362,-2.9) 13(1.087,-2.9) 14(1.812,-2.9) 23(1.812,2.9) 24(1.087,2.9) 25(0.362,2.9) 26(-0.363,2.9) 27(-1.088,2.9) 28(-1.813,2.9)
  silkscreen extent -4,3.25 -3.25,4, body extent -3,-3 3,3, height 0.6
SKY65404-31 [mm]
  rect 0.7x1.2 smd: 0(0,0)
  rect 0.65x0.35 smd: 1(-0.87,0.5) 2(-0.87,0) 3(-0.87,-0.5) 4(0.87,-0.5) 5(0.87,0) 6(0.87,0.5)
  silkscreen extent -2,1 -1.8,1, body extent -0.75,-0.75 0.75,0.75, height 0.45
SMA-2 [mm]
  rect 0.75x1.5 smd: 1(2.5,1.2)
  rect 2x4 smd: GND(0,0) GND(5,0)
SOT23-5 [mil] "SOT23-5"
  rect 22x48 smd: 1(-37.4,-51.19) 2(0,-51.19) 3(38,-51.19) 4(38,52) 5(-37.4,52)
  silkscreen extent -56,-17 56,32
TestPad [mil]
  round 60 hole 30: 1(0,0)
"TestPad - 1mm" [mm]
  round 1 smd: 1(0,0)
TPS62130 [mm]
  rect 1.7x1.7 smd: 0(0,0)
  rect 0.6x0.25 smd: 1(-1.5,0.75) 2(-1.5,0.25) 3(-1.5,-0.25) 4(-1.5,-0.75) 9(1.5,-0.75) 10(1.5,-0.25) 11(1.5,0.25) 12(1.5,0.75)
  rect 0.25x0.6 smd: 5(-0.75,-1.5) 6(-0.25,-1.5) 7(0.25,-1.5) 8(0.75,-1.5) 13(0.75,1.5) 14(0.25,1.5) 15(-0.25,1.5) 16(-0.75,1.5)
  silkscreen extent -1.5,-1.5 1.5,1.5, body extent -1.5,-1.5 1.5,1.5, height 0.6

## Part data
C1 C3 C4 C5 C6 C7 C8 C9 C10 C11 C13 C14 C15 C16 C17 C18 C19 C21 C22 C23 C24 C25 C26 C27 C28 C29 C30 C31 C32 C33 C34 C35 C36 C37 C38 C39 C40 C41 C42 C47 C48 C49 C50 C51 C52 C53 C54 C55 C56 C57 C58 C59 C60 C61 C62 C63 C64 C65 C66 C67 C68 C69 C70 C71 C72 C73 C74 C75 C76 C77 C78 C79 C80 C81 C82 C83 C84 C85 C86 C87 C88 C89: "Capacitor"
C2 C12 C20 C43 C44 C45 C46 C90 C91 C92 C93: library part Cap, "Capacitor"
J1 J2 J3 J4 J5 J6 J7 J8 J9 J10 J11 J12 J13 J14 J15 J16 J17 J18 J19 J20 J21 J22: library part SW-SPDT, "SPDT Subminiature Toggle Switch, Right Angle Mounting, Vertical Actuation"
L12 L13: library part Inductor, "Inductor"
LNA1 LNA2 LNA3 LNA4: library part SKY65404-31
R1 R2 R3 R4 R5 R7 R8 R9 R10 R11 R12 R13 R14 R19 R20 R21 R22 R23 R25 R26 R27 R29 R30 R31 R32 R33 R34 R35 R36 R37 R38 R39: "Resistor"
R6 R15 R16 R17 R18 R24 R28 R40 R41: library part Res2, "Resistor"
USB1: library part USB_Micro_TypeB, "Connector SMD USB Micro Type B middle mount"

## Via types
v1: diameter 19.68, hole 11.81, Top Layer to Bottom Layer, 315 vias
v2: diameter 20/20/20 (per signal layer), hole 12, Top Layer to Bottom Layer, 9 vias
v3: diameter 118.11, hole 78.74, Top Layer to Bottom Layer, 2 vias

## Nets (pads, with @x,y where several pads share a name; then routed paths per layer and width w, separated by ;. In a path a pad name is that pad's centre, name@x,y a point inside that pad or via, vN(x,y) a via of type N, cw(c..) or ccw(c..) an arc to the next point about the centre after c; other vN are vias at no path point)
3.3LNA: C6.2 C7.2 C21.2 C25.2 C45.2 C47.2 C48.2 C60.2 C61.2 C89.2 C90.1 C91.1 L1.2 L3.2 L7.2 L10.2 L15.1 L16.1 R1.2 R2.2 R7.2 R8.2 R35.1 T16.1 U7.5 U8.16 U8.17 U12.5 U13.5 U14.5 | length 4340.5
  Top Layer w15: L7.2@-2329,2056 C21.2@-2298,2056 -2298,2038 -2276,2016 R7.2@-2219,2016 -2198,1995 -2120,1995 -2095,2020 -1784,2020 v1@-1774,2030 ; C6.2@-2325,1278 v1(-2325,1297.5) L1.2@-2325,1317 R1.2@-2292,1317 ; v1(-1870,1265) C7.2@-1870,1284 ; C7.2@-1868,1286 L3.2@-1868,1322 R2.2@-1834,1322 ; L10.2@-1807,2053 C25.2@-1774,2053 v1@-1774,2030 ; R8.2@-1699,2014 -1713,2000 -1760,2000 -1774,2014 v1@-1774,2030 ; C45.2@-1668.6,2325.6 U7.5@-1608,2325.6 -1608,2292 T16.1@-1625,2275 ; U13.5@-1619.6,1475 C90.1@-1584.68,1475 ; C91.1@-1420.5,1480 -1420.5,1533.59 -1420.31,1533.78 -1420.31,1555.09 U14.5@-1383,1592.4
  Signal Layer 1 w15: v1(-1870,1265) -1685,1450 -1660,1450 -1630,1480 v1(-1575,1480) ; v1(-1835,1775) -1780,1830 v1(-1780,2030) -1745,2065 -1745,2125 -1715,2155 -1715,2210 -1640,2285 v1(-1640,2325)
  Bottom Layer w10: v1(-2325,1297.5) -2395,1227.5 -2395,1208.08 -2395.84,1207.24 -2395.84,915.84 -2370.32,890.32 R35.1@-2350,890.32 C89.2@-2224.68,890.32
  Bottom Layer w12: -1565,1480 L15.1@-1516.42,1431.42 ; L15.1@-1517,1431.42 L15.1@-1516.42,1431.42 ; L15.1@-1515,1430 L15.1@-1516.42,1431.42 ; v1(-1425,1505) -1420,1505 -1420,1475 -1463.58,1431.42 L15.1@-1516.42,1431.42
  Bottom Layer w15: v1(-2325,1297.5) -2257.5,1230 -2060,1230 ; C89.2@-2220,895 -2194.4,895 U12.5@-2177.4,878 ; C61.2@-2060,1320 -2060,1230 ; v1(-1870,1265) -1905,1230 -2060,1230 ; C47.2@-1768.94,1873.53 C48.2@-1768.94,1836.53 -1768.94,1835.12 -1793.04,1811.03 -1798.97,1811.03 v1(-1835,1775) -1835,1655 -1715,1535 -1630,1535 v1(-1575,1480) ; C47.2@-1767.13,1871.71 U8.17@-1721.12,1871.71 ; C48.2@-1762.3,1843.17 U8.16@-1721.12,1843.17
  other v1: -1614,2262
3.6V: C41.2 C42.2 C50.2 C51.2 C52.2 C53.2 C63.2 L13.2 R12.1 R16.1 R19.2 R20.1 T14.1 U6.14 U8.23 U8.24 U8.25 U8.26 | length 2981.8
  Top Layer w10: U6.14@-2290.84,2502.94 -2290.84,2485.08 -2283.47,2477.71 v1(-2283.47,2476.12)
  Top Layer w20: v1(-2383,1568) -2383,1546.54 R12.1@-2380,1543.54 ; C42.2@-2162,2375.48 C41.2@-2162,2455 -2162,2480.26 L13.2@-2129,2513.26
  Signal Layer 1 w10: -2168.88,2476.12 v1(-2160,2485) ; v1(-1602.71,2057.29) -1572.29,2057.29 -1505,1990 v1(-1280,1990)
  Signal Layer 1 w20: v1(-2405,1560) -2400,1560 -2380,1580 ; v1(-2383,1568) -2383,1577 -2380,1580 ; v1(-2360,1553) -2360,1560 -2365,1565 -2380,1580 ; v1(-2195,2345) v1(-2195,2395) ; v1(-2195,2370) -2400,2165 -2400,1830 -2380,1810 -2380,1580
  Bottom Layer w10: v1(-2283.47,2476.12) -2168.88,2476.12 ; v1(-2170,2655) -2160,2645 v1(-2160,2485) ; U8.23@-1678.3,2028.7 C50.2@-1678.3,2059.89 ; U8.24@-1649.76,2028.7 C63.2@-1649.76,2067.71 ; U8.25@-1621.22,2028.7 C51.2@-1621.22,2061.26 ; C51.2@-1613.94,2068.53 v1(-1602.71,2057.29) -1592.67,2047.26 U8.26@-1592.67,2028.7
  Bottom Layer w15: C53.2@-1811.47,2068.53 C50.2@-1686.94,2068.53 C63.2@-1648.94,2068.53 C51.2@-1613.94,2068.53 ; R19.2@-1392.94,1972.53 -1385.26,1980.21 R20.1@-1354.94,1980.21 T14.1@-1304.79,1980.21 ; T14.1@-1295,1990 v1(-1280,1990)
  Bottom Layer w20: v1(-2195,2345) -2172.5,2367.5 ; v1(-2195,2370) -2170,2370 ; v1(-2195,2395) -2170,2370 ; C53.2@-1815,2065 -1875,2125 -2040,2125 -2090,2175 -2090,2310 -2150,2370 -2170,2370
5V: C10.2 C11.2 C12.1 C13.1 C15.2 C17.2 C37.2 C38.2 C46.2 C74.2 C87.2 L12.2 R6.2 R11.1 R15.1 R24.2 R30.1 R33.2 T12.1 U2.8 U2.9 U2.18 U2.19 U2.20 U5.14 U7.1 U7.3 U11.16 | length 4892.3
  Top Layer w10: R11.1@-2322,1543.54 v1(-2303.54,1543.54) ; U2.20@-2216.37,1164.71 -2216.37,1211 C12.1@-2216.37,1217.91 ; U2.19@-2196.68,1164.71 -2196.68,1190.63 -2177,1210.32 U2.18@-2177,1164.71 ; C17.2@-2177,958 U2.8@-2177,1003.29 -2177,1017.98 v1(-2173.95,1021.03) ; C17.2@-2173,954 C15.2@-2138,954 -2157.32,973.32 U2.9@-2157.32,1003.29 ; U5.14@-1931.84,2506.94 -1931.84,2486.84 -1929.12,2484.12 v1(-1928.47,2484.12) ; R15.1@-1797.32,2650 -1715,2650 -1685,2620 -1685,2530 -1705.74,2509.26 ; L12.2@-1768,2509.26 -1705.74,2509.26 ; v1(-1595,1175) -1595,1155 -1538.23,1098.23 v1(-1538.23,891.77) ; U7.1@-1525.6,2325.6 -1552.84,2352.84 -1552.84,2399.16 -1551,2401 ; U7.3@-1504.81,2401 -1551,2401 ; -1705.74,2509.26 -1666.48,2470 T12.1@-1665,2470 -1620,2470 -1551,2401
  Top Layer w15: C11.2@-2269,1211 -2216.37,1211 C10.2@-2141,1211 ; L12.2@-1768,2509.26 -1794,2483.26 C37.2@-1794,2454 -1794,2424.52 C38.2@-1734.48,2365 ; U7.1@-1503.41,2327 C46.2@-1440,2327 -1383,2327 -1360,2350 R24.2@-1360,2396
  Signal Layer 1 w10: v1(-2215,1195) -2235,1175 -2235,1045 -2211.03,1021.03 v1(-2173.95,1021.03) -2173.95,901.05 -2204.24,870.76 v1(-2204.24,869.16) -1770.84,869.16 v1(-1755,885)
  Signal Layer 1 w20: v1(-2290,1195) -2270,1215 -2270,1510 v1(-2303.54,1543.54) ; v1(-1765,2325) -1777.5,2337.5 ; v1(-1765,2350) -1777.5,2337.5 ; v1(-1765,2375) -1777.5,2362.5 -1777.5,2337.5 ; -2320,1560 -2320,1545 -2305,1530 v1(-2305,1520) -2303.54,1521.46 v1(-2303.54,1543.54) ; -2320,1560 v1(-2303.54,1543.54) ; -2320,1560 -2320,2150 -2185,2285 -1830,2285 -1777.5,2337.5
  Bottom Layer w10: v1(-2204.24,869.16) v1(-2204.24,869.16) ; v1(-1928.47,2484.12) -1790.88,2484.12 v1(-1790,2485) ; C87.2@-1745,890 R33.2@-1710,890 -1680,860 -1570,860 v1(-1538.23,891.77) U11.16@-1538.23,966.61 ; R30.1@-1630,1199.68 -1620.32,1190 C74.2@-1595,1190
  other v1: -2290,1220 -2305,1570 -1666,2469